# Allegro board 14134-IMX178_LV_REFB_VER_A.brd
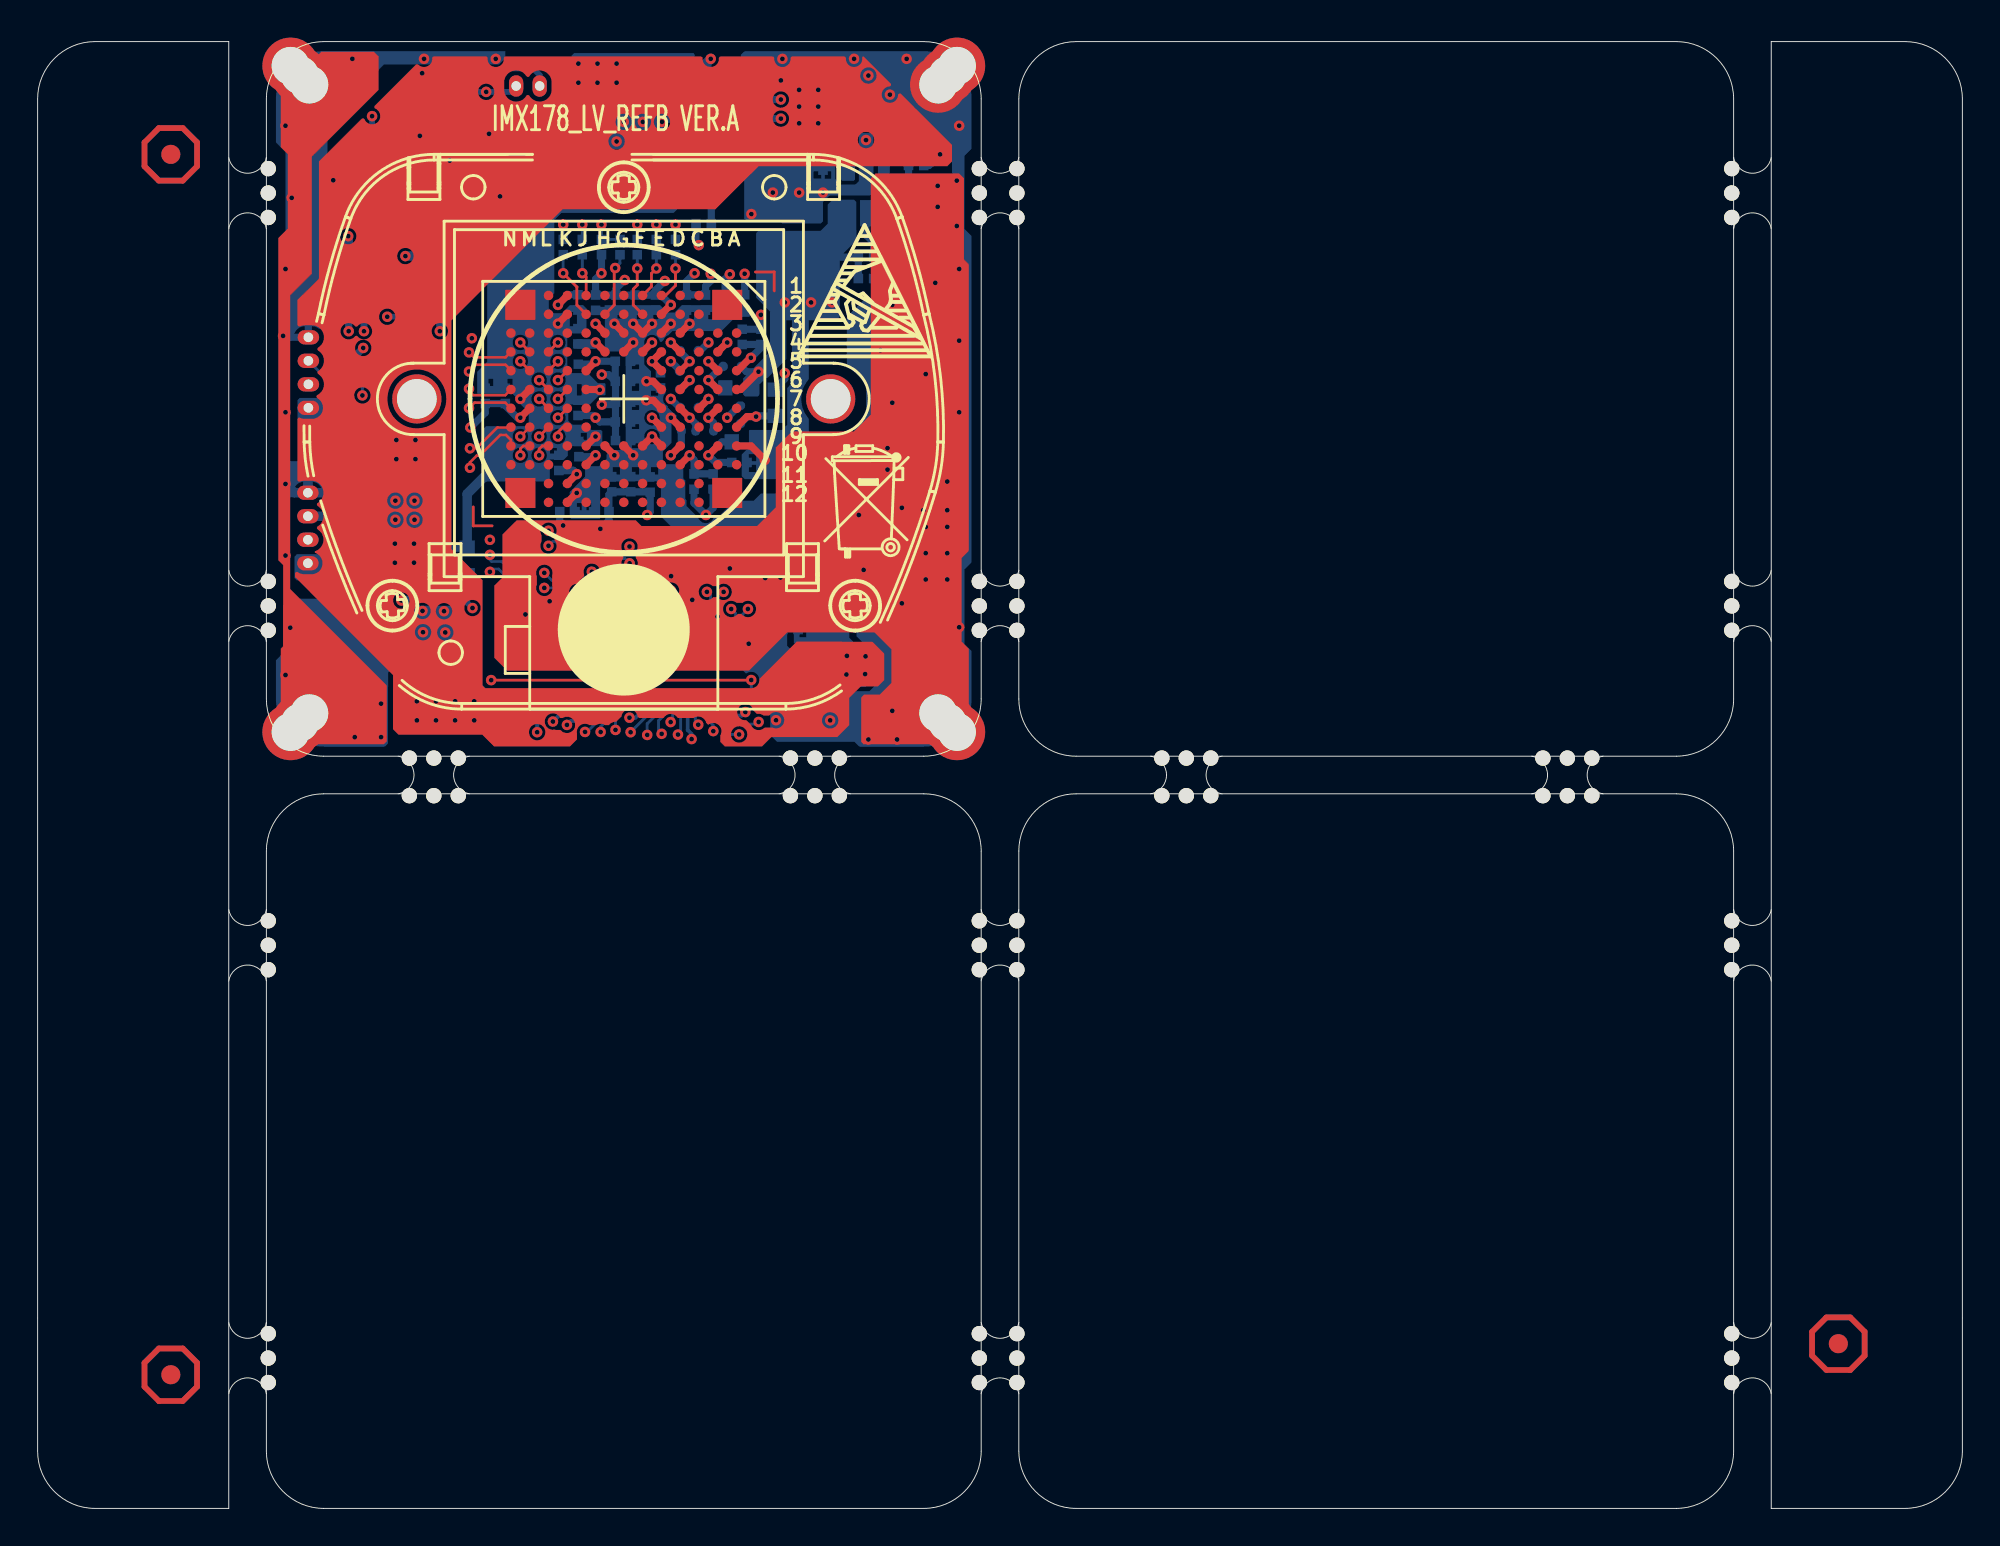
[diagram p0: board, top side]
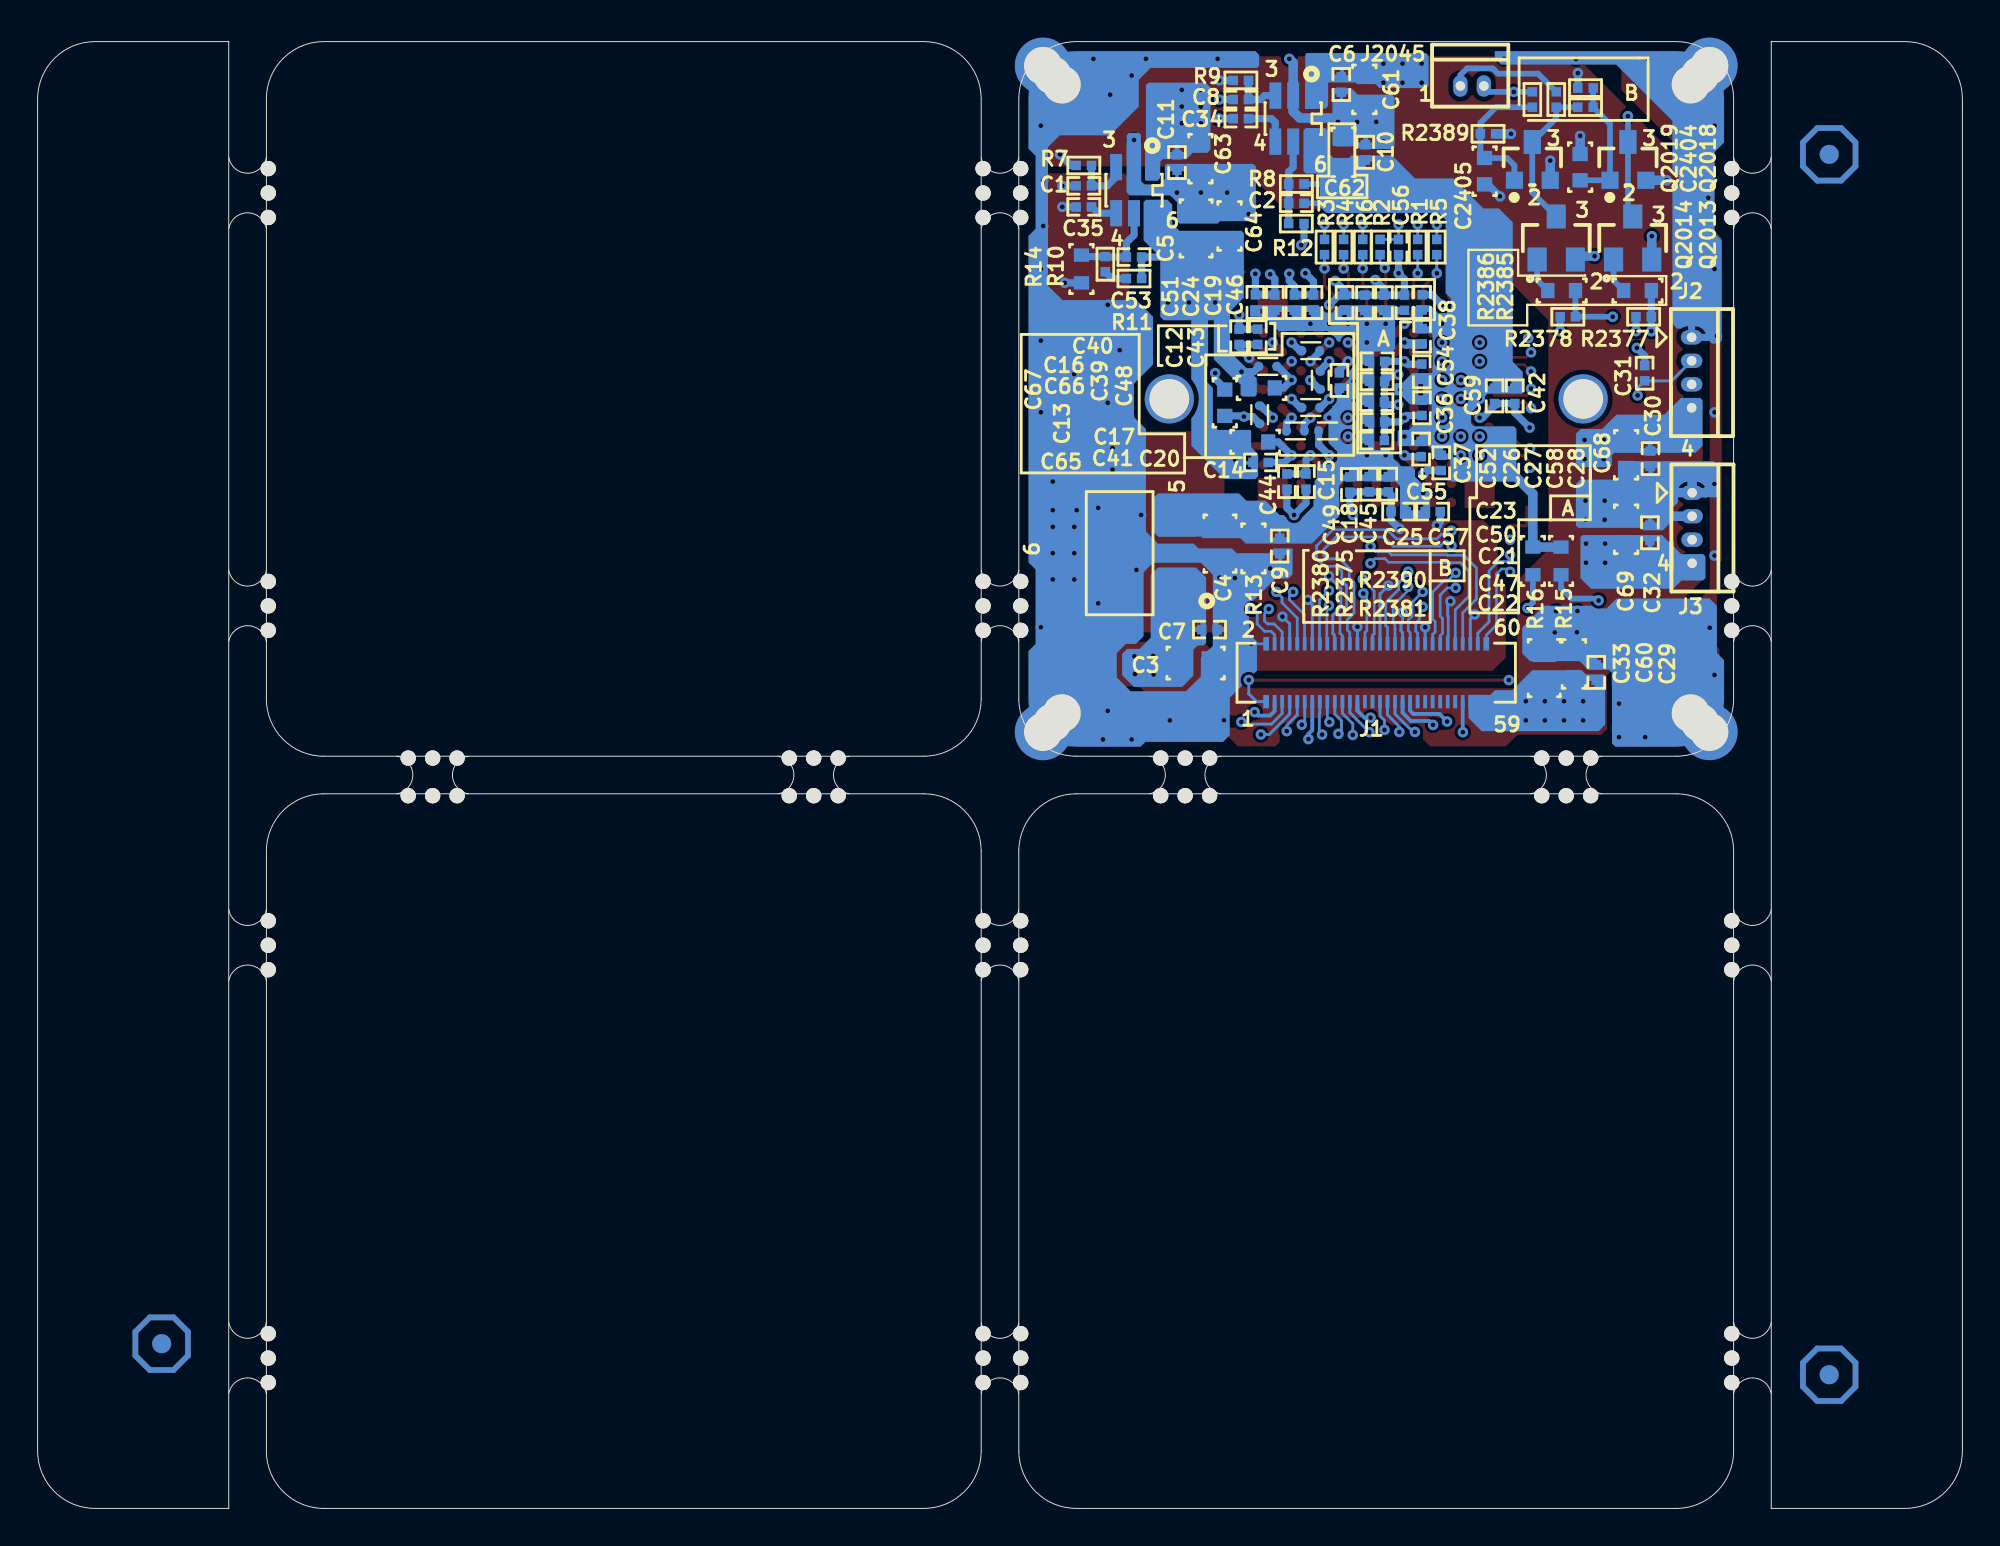
[diagram p1: board, bottom side, seen from below]

Outline 102.32 x 78 mm; copper layers: TOP, GND02, ART03, ART04, POWER05, BOTTOM. Coordinates in mm from the lower left corner of the outline.
Outline path: 0,74.95 arc(0.89,77.11) 3.05,78 10.16,78 10.16,0 3.05,0 arc(0.89,0.89) 0,3.05 0,74.95 ; 12.16,74.95 arc(13.05,77.11) 15.21,78 47.11,78 arc(49.27,77.11) 50.16,74.95 50.16,43.05 arc(49.27,40.89) 47.11,40 15.21,40 arc(13.05,40.89) 12.16,43.05 12.16,74.95 ; 12.16,34.95 arc(13.05,37.11) 15.21,38 47.11,38 arc(49.27,37.11) 50.16,34.95 50.16,3.05 arc(49.27,0.89) 47.11,0 15.21,0 arc(13.05,0.89) 12.16,3.05 12.16,34.95 ; 52.16,74.95 arc(53.05,77.11) 55.21,78 87.11,78 arc(89.27,77.11) 90.16,74.95 90.16,43.05 arc(89.27,40.89) 87.11,40 55.21,40 arc(53.05,40.89) 52.16,43.05 52.16,74.95 ; 52.16,34.95 arc(53.05,37.11) 55.21,38 87.11,38 arc(89.27,37.11) 90.16,34.95 90.16,3.05 arc(89.27,0.89) 87.11,0 55.21,0 arc(53.05,0.89) 52.16,3.05 52.16,34.95 ; 92.16,78 99.27,78 arc(101.43,77.11) 102.32,74.95 102.32,3.05 arc(101.43,0.89) 99.27,0 92.16,0 92.16,78

## Design rules (mm)
net group DIFFPAIR0: nets MIPI0_D2M MIPI0_D2P
net group DIFFPAIR1: nets MIPI0_D0M MIPI0_D0P
net group DIFFPAIR2: nets MIPI0_CKM MIPI0_CKP
net group DIFFPAIR3: nets MIPI0_D3M MIPI0_D3P
net group DIFFPAIR4: nets MIPI1_D2M MIPI1_D2P
net group DIFFPAIR5: nets MIPI1_D0M MIPI1_D0P
net group DIFFPAIR6: nets MIPI1_CKM MIPI1_CKP
net group DIFFPAIR7: nets MIPI1_D1M MIPI1_D1P
net group DIFFPAIR8: nets MIPI1_D3M MIPI1_D3P
net group DIFFPAIR9: nets MIPI0_D1M MIPI0_D1P

## Placement (name value [footprint] x y rotation side)
C1  -  [SC0402]  46.7 70.33 0 bottom
C2  -  [SC0402]  35.41 69.41 0 bottom
C3  -  [SC0805]  40.76 44.95 180 bottom
C4  -  [SC0805]  39.46 51.3 270 bottom
C5  -  [SC0805]  40.73 68.07 90 bottom
C6  -  [SC0402]  33.02 75.72 270 bottom
C7  -  [SC0402]  40.02 46.73 180 bottom
C8  -  [SC0402]  38.35 74.92 0 bottom
C9  -  [SC0402]  36.29 51.18 270 bottom
C10  -  [SC0402]  31.74 72.11 90 bottom
C11  -  [SC0402]  41.75 71.57 270 bottom
C12  -  [SC0402]  38.45 62.3 90 bottom
C13  -  [SC0402-BGA]  37.36 58.16 90 bottom
C14  -  [SC0402]  37.31 55.62 180 bottom
C15  -  [SC0402]  34.89 54.6 270 bottom
C16  -  [SC0402-BGA]  36.92 60.73 180 bottom
C17  -  [SC0402-BGA]  34.64 58.54 180 bottom
C18  -  [SC0402]  31.53 54.46 270 bottom
C19  -  [SC0402]  35.51 64.12 90 bottom
C20  -  [SC0402-BGA]  33.75 57.3 0 bottom
C21  -  [SC0402]  31.13 58.83 180 bottom
C22  -  [SC0402]  31.13 56.79 180 bottom
C23  -  [SC0402]  31.11 61 180 bottom
C24  -  [SC0402]  36.55 64.12 90 bottom
C25  -  [SC0402]  29.97 53.01 0 bottom
C26  -  [SC0402]  31.76 64.11 90 bottom
C27  -  [SC0402]  30.75 64.11 90 bottom
C28  -  [SC0402]  28.72 64.13 90 bottom
C29  -  [SC0402]  19.46 44.46 90 bottom
C30  -  [SC0402]  16.58 55.82 270 bottom
C31  -  [SC0402]  16.89 60.37 90 bottom
C32  -  [SC0402]  16.61 51.88 90 bottom
C33  -  [SC0805]  22.23 44.69 90 bottom
C34  -  [SC0402]  38.35 73.9 0 bottom
C35  -  [SC0402]  46.7 69.21 0 bottom
C36  -  [SC0402]  28.73 58.53 270 bottom
C37  -  [SC0402]  27.7 55.6 270 bottom
C38  -  [SC0402]  28.72 62.33 270 bottom
C39  -  [SC0402-BGA]  34.13 59.99 90 bottom
C40  -  [SC0402-BGA]  34.64 61.56 0 bottom
C41  -  [SC0402-BGA]  35.46 57.3 180 bottom
C42  -  [SC0402]  23.79 59.16 270 bottom
C43  -  [SC0402]  37.45 62.3 90 bottom
C44  -  [SC0402]  35.91 54.6 270 bottom
C45  -  [SC0402]  30.52 54.46 270 bottom
C46  -  [SC0402]  34.49 64.12 90 bottom
C47  -  [SC0402]  31.11 57.78 180 bottom
C48  -  [SC0402]  33.11 59.98 90 bottom
C49  -  [SC0402]  32.56 54.45 270 bottom
C50  -  [SC0402]  31.11 59.93 180 bottom
C51  -  [SC0402]  37.59 64.13 90 bottom
C52  -  [SC0402]  32.84 64.12 90 bottom
C53  -  [SC0402]  44.04 66.54 0 bottom
C54  -  [SC0402]  28.74 60.44 90 bottom
C55  -  [SC0402]  28.77 56.33 270 bottom
C56  -  [SC0402]  29.98 67.07 270 bottom
C57  -  [SC0402]  28.16 53.01 180 bottom
C58  -  [SC0402]  29.66 64.11 90 bottom
C59  -  [SC0402]  24.87 59.16 270 bottom
C60  -  [SC0603]  20.65 44.9 90 bottom
C61  -  [SC0603]  31.79 75.46 270 bottom
C62  -  [SC0603]  32.91 72.12 90 bottom
C63  -  [SC0603]  40.51 71.78 270 bottom
C64  -  [SC0603]  38.96 68.19 90 bottom
C65  -  [SC0603]  37.6 56.71 180 bottom
C66  -  [SC0603]  37.26 59.58 180 bottom
C67  -  [SC0603]  39.21 58.8 90 bottom
C68  -  [SC0603]  17.87 56.03 270 bottom
C69  -  [SC0603]  17.87 52.06 90 bottom
C2404  -  [SC0603]  20.32 71.33 270 bottom
C2405  -  [SC0603]  25.4 71.11 90 bottom
J1  -  [SED60-16F-A]  31.16 44.44 180 bottom
J2  -  [WBC0104-49T]  14.39 62.28 270 bottom
J3  -  [WBC0104-49T]  14.37 54.01 270 bottom
J2045  -  [SIP-2P-20]  26.69 75.64 180 bottom
M1  -  [HOLE_3]  47.87 42.29 0 top
M2  -  [HOLE_3]  47.87 75.71 90 top
M3  -  [HOLE_3]  13.45 76.71 0 top
M4  -  [HOLE_3]  13.45 41.29 90 top
NOREF  -  []  46.6 53.67 0 top
NOREF#2  -  [unnamed#2]  11.16 28.65 270 top
NOREF#3  -  []  31.67 46.96 0 top
NOREF#4  -  []  15.21 40 90 top
NOREF#5  -  []  0 3.05 0 top
NOREF#6  -  [unnamed#3]  51.16 71.25 90 top
NOREF#7  -  [unnamed#3]  40.02 39 180 top
NOREF#8  -  [unnamed#3]  59.76 39 180 top
NOREF#9  -  [unnamed#2]  11.16 6.69 270 top
NOREF#10  -  [unnamed#3]  19.76 39 180 top
NOREF#11  -  []  164.84 166.97 0 top
NOREF#12  -  [unnamed#3]  51.16 31.25 90 top
NOREF#13  -  [unnamed#4]  95.73 8.76 0 top
NOREF#14  -  [unnamed#2]  91.16 9.29 90 top
NOREF#15  -  [unnamed#2]  11.16 68.65 270 top
NOREF#16  -  [unnamed#2]  91.16 71.25 90 top
NOREF#17  -  []  168.72 93.19 0 top
NOREF#18  -  []  12.16 74.95 0 top
NOREF#19  -  []  52.19 151.38 0 top
NOREF#20  -  [unnamed#4]  7.08 7.11 0 top
NOREF#21  -  []  43.27 64.26 0 top
NOREF#22  -  []  -118.88 -143.82 0 top
NOREF#23  -  [unnamed#2]  91.16 31.25 90 top
NOREF#24  -  [unnamed#2]  91.16 49.29 90 top
NOREF#25  -  [unnamed#3]  51.16 49.29 90 top
NOREF#26  -  [unnamed#3]  51.16 9.29 90 top
NOREF#27  -  [unnamed#4]  7.08 72 0 top
NOREF#28  -  [unnamed#2]  11.16 46.69 270 top
NOREF#29  -  []  10.18 75.28 0 top
NOREF#30  -  []  15.21 0 90 top
NOREF#31  -  [unnamed#3]  80.02 39 180 top
NOREF#32  -  [unnamed#4]  7.08 7.11 180 bottom
NOREF#33  -  [unnamed#4]  7.08 72 180 bottom
NOREF#34  -  [unnamed#4]  95.73 8.76 180 bottom
Q2013  -  [SOT23]  17.53 67.55 180 bottom
Q2014  -  [SOT23]  21.59 67.55 180 bottom
Q2018  -  [HSOT23]  17.78 71.62 180 bottom
Q2019  -  [HSOT23]  22.86 71.62 180 bottom
R1  -  [SR0402]  28.96 67.07 90 bottom
R2  -  [SR0402]  30.96 67.07 90 bottom
R3  -  [SR0402]  33.91 67.07 90 bottom
R4  -  [SR0402]  32.89 67.07 90 bottom
R5  -  [SR0402]  27.94 67.07 90 bottom
R6  -  [SR0402]  31.88 67.07 90 bottom
R7  -  [SR0402]  46.7 71.41 180 bottom
R8  -  [SR0402]  35.41 70.42 0 bottom
R9  -  [SR0402]  38.35 75.94 180 bottom
R10  -  [SR0402]  45.56 66.16 90 bottom
R11  -  [SR0402]  44.04 65.4 0 bottom
R12  -  [SR0402]  35.41 68.32 180 bottom
R13  -  [SR0603]  37.69 51.05 270 bottom
R14  -  [SR0603]  46.83 65.91 270 bottom
R15  -  [SR0603]  21.34 50.39 90 bottom
R16  -  [SR0603]  22.83 50.38 90 bottom
R2375  -  [SR0402]  21.59 74.92 90 bottom
R2377  -  [SR0402]  16.94 63.37 0 bottom
R2378  -  [SR0402]  20.97 63.37 0 bottom
R2380  -  [SR0402]  22.86 74.92 90 bottom
R2381  -  [SR0402]  20.03 74.51 0 bottom
R2385  -  [SR0603]  17.27 64.76 0 bottom
R2386  -  [SR0603]  21.3 64.76 0 bottom
R2389  -  [SR0402]  25.22 73.1 0 bottom
R2390  -  [SR0402]  20.03 75.53 180 bottom
U1  VALUE  [LGA128-40-1312]  31.16 59 180 top
U2  -  [SOT223-6A]  44.8 50.79 90 bottom
U3  -  [SOT23-6B]  35.57 73.9 0 bottom
U4  -  [SOT23-6B]  44.04 70.1 0 bottom
U5  VALUE  [LENS_SOCKET-GS5]  31.16 59 0 top

## Library data of the parts
C1 C2 C6-C12 C14 C15 C18 C19 C21-C32 C34-C38 C42-C59 = SC0402
C3-C5 C33 = SC0805
C13 C16 C17 C20 C39-C41 = SC0402-BGA
C60-C69 C2404 C2405 = SC0603
J1 = SED60-16F-A
J2 J3 = WBC0104-49T
J2045 = SIP-2P-20
M1-M4 = HOLE_3
Q2013 Q2014 = SOT23
Q2018 Q2019 = HSOT23
R1-R12 R2375 R2377 R2378 R2380 R2381 R2389 R2390 = SR0402
R13-R16 R2385 R2386 = SR0603
U1 = LGA128-40-1312
U2 = SOT223-6A
U3 U4 = SOT23-6B
U5 = LENS_SOCKET-GS5

## Footprints (pads in the part's own frame, mm; a bottom-side part is the same pattern mirrored in y, then rotated)
HOLE_3
  round 2.997 hole 2.007: 1(0,0) 2(0.5,-0.5) 3(1,-1)
HSOT23
  rect 0.914x0.914 smd: 1(-0.953,-0.991) 2(0.953,-0.991)
  rect 0.914x1.27 smd: 3(0,1.041)
LENS_SOCKET-GS5
  round 2.616 hole 2.108: 1(-11,0) 2(11,0)
LGA128-40-1312
  rect 1.6x1.6 smd: 1(-5.5,-5) 2(-5.5,5) 3(5.5,-5) 4(5.5,5)
  round 0.508 smd: A3(-6,-3.5) A4(-6,-2.5) A5(-6,-1.5) A6(-6,-0.5) A7(-6,0.5) A8(-6,1.5) A9(-6,2.5) A10(-6,3.5) B3(-5,-3.5) B4(-5,-2.5) B5(-5,-1.5) B6(-5,-0.5) B7(-5,0.5) B8(-5,1.5) B9(-5,2.5) B10(-5,3.5) C1(-4,-5.5) C2(-4,-4.5) C3(-4,-3.5) C4(-4,-2.5) C5(-4,-1.5) C6(-4,-0.5) C7(-4,0.5) C8(-4,1.5) C9(-4,2.5) C10(-4,3.5) C11(-4,4.5) C12(-4,5.5) D1(-3,-5.5) D2(-3,-4.5) D3(-3,-3.5) D4(-3,-2.5) D5(-3,-1.5) D6(-3,-0.5) D7(-3,0.5) D8(-3,1.5) D9(-3,2.5) D10(-3,3.5) D11(-3,4.5) D12(-3,5.5) E1(-2,-5.5) E2(-2,-4.5) E3(-2,-3.5) E4(-2,-2.5) E5(-2,-1.5) E6(-2,-0.5) E7(-2,0.5) E8(-2,1.5) E9(-2,2.5) E10(-2,3.5) E11(-2,4.5) E12(-2,5.5) F1(-1,-5.5) F2(-1,-4.5) F3(-1,-3.5) F4(-1,-2.5) F9(-1,2.5) F10(-1,3.5) F11(-1,4.5) F12(-1,5.5) G1(0,-5.5) G2(0,-4.5) G3(0,-3.5) G4(0,-2.5) G9(0,2.5) G10(0,3.5) G11(0,4.5) G12(0,5.5) H1(1,-5.5) H2(1,-4.5) H3(1,-3.5) H4(1,-2.5) H9(1,2.5) H10(1,3.5) H11(1,4.5) H12(1,5.5) J1(2,-5.5) J2(2,-4.5) J3(2,-3.5) J4(2,-2.5) J5(2,-1.5) J6(2,-0.5) J7(2,0.5) J8(2,1.5) J9(2,2.5) J10(2,3.5) J11(2,4.5) J12(2,5.5) K1(3,-5.5) K2(3,-4.5) K3(3,-3.5) K4(3,-2.5) K5(3,-1.5) K6(3,-0.5) K7(3,0.5) K8(3,1.5) K9(3,2.5) K10(3,3.5) K11(3,4.5) K12(3,5.5) L1(4,-5.5) L2(4,-4.5) L3(4,-3.5) L4(4,-2.5) L5(4,-1.5) L6(4,-0.5) L7(4,0.5) L8(4,1.5) L9(4,2.5) L10(4,3.5) L11(4,4.5) L12(4,5.5) M3(5,-3.5) M4(5,-2.5) M5(5,-1.5) M6(5,-0.5) M7(5,0.5) M8(5,1.5) M9(5,2.5) M10(5,3.5) N3(6,-3.5) N4(6,-2.5) N5(6,-1.5) N6(6,-0.5) N7(6,0.5) N8(6,1.5) N9(6,2.5) N10(6,3.5)
SC0402
  rect 0.508x0.508 smd: 1(-0.406,0) 2(0.406,0)
SC0402-BGA
  custom 0.475x0.51 smd: 1(-0.47,0) 2(0.47,0)
SC0603
  rect 0.762x0.813 smd: 1(-0.699,0) 2(0.699,0)
SC0805
  rect 0.991x1.27 smd: 1(-0.813,0) 2(0.813,0)
SED60-16F-A
  rect 0.305x0.711 smd: 1(-5.851,-1.54) 2(-5.851,1.54) 59(5.851,-1.54) 60(5.851,1.54)
  rect 0.203x0.711 smd: 3(-5.4,-1.54) 4(-5.4,1.54) 5(-5,-1.54) 6(-5,1.54) 7(-4.6,-1.54) 8(-4.6,1.54) 9(-4.2,-1.54) 10(-4.2,1.54) 11(-3.8,-1.54) 12(-3.8,1.54) 13(-3.4,-1.54) 14(-3.4,1.54) 15(-3,-1.54) 16(-3,1.54) 17(-2.6,-1.54) 18(-2.6,1.54) 19(-2.2,-1.54) 20(-2.2,1.54) 21(-1.8,-1.54) 22(-1.8,1.54) 23(-1.4,-1.54) 24(-1.4,1.54) 25(-1,-1.54) 26(-1,1.54) 27(-0.6,-1.54) 28(-0.6,1.54) 29(-0.2,-1.54) 30(-0.2,1.54) 31(0.2,-1.54) 32(0.2,1.54) 33(0.6,-1.54) 34(0.6,1.54) 35(1,-1.54) 36(1,1.54) 37(1.4,-1.54) 38(1.4,1.54) 39(1.8,-1.54) 40(1.8,1.54) 41(2.2,-1.54) 42(2.2,1.54) 43(2.6,-1.54) 44(2.6,1.54) 45(3,-1.54) 46(3,1.54) 47(3.4,-1.54) 48(3.4,1.54) 49(3.8,-1.54) 50(3.8,1.54) 51(4.2,-1.54) 52(4.2,1.54) 53(4.6,-1.54) 54(4.6,1.54) 55(5,-1.54) 56(5,1.54) 57(5.4,-1.54) 58(5.4,1.54)
SIP-2P-20
  oval 0.762x1.143 hole 0.508: 1(0,0) 2(1.25,0)
SOT23
  rect 1.016x1.27 smd: 1(-1.016,-1.143) 2(1.016,-1.143) 3(0,1.143)
SOT23-6B
  rect 0.635x1.397 smd: 1(-0.95,-1.225) 2(0,-1.225) 3(0.95,-1.225) 4(0.95,1.225) 5(0,1.225) 6(-0.95,1.225)
SOT223-6A
  rect 0.762x2.032 smd: 1(-2.54,-3.05) 2(-1.27,-3.05) 3(0,-3.05) 4(1.27,-3.05) 5(2.54,-3.05)
  rect 3.556x2.032 smd: 6(0,3.05)
SR0402
  rect 0.508x0.508 smd: 1(-0.406,0) 2(0.406,0)
SR0603
  rect 0.711x0.813 smd: 1(-0.737,0) 2(0.737,0)
unnamed#2
  round 0.813 hole 0.813 unplated: (-2.6,1.1) (-1.3,1.1) (0,1.1)
unnamed#3
  round 0.813 hole 0.813 unplated: (-2.6,1.1) (-2.6,-0.9) (-1.3,1.1) (-1.3,-0.9) (0,1.1) (0,-0.9)
unnamed#4
  round 1.016 smd: 1(0,0)
WBC0104-49T
  oval 0.762x1.143 hole 0.508: 1(0,0) 2(1.25,0) 3(2.5,0) 4(3.75,0)

## Nets
3V3: C3.1 C6.1 C7.1 C11.1 C29.1 C30.1 C32.1 C33.1 C60.1 C61.1 C63.1 C68.1 C69.1 C2404.1 C2405.1 J1.55 J1.57 J1.59 J2.4 J3.4 Q2018.2 Q2019.2 R7.1 R9.1 R2389.1 R2390.1 U2.1 U2.2 U3.1 U4.1
AVDD_2V9: C5.1 C12.1 C13.1 C14.1 C15.1 C16.1 C43.1 C44.1 C53.1 C64.1 C65.1 C66.1 C67.1 R11.1 U1.A5 U1.A6 U1.A8 U1.A9 U1.D10 U4.6
DVDD_1V2: C4.1 C9.1 C18.1 C19.1 C20.1 C21.1 C22.1 C23.1 C24.1 C25.1 C26.1 C27.1 C45.1 C46.1 C47.1 C48.1 C49.1 C50.1 C51.1 C52.1 C57.1 C58.1 R13.1 U1.D3 U1.D8 U1.E3 U1.E6 U1.E7 U1.F3 U1.G3 U1.G4 U1.G9 U1.H9 U1.K12 U2.4 U2.5
GND: C1.2 C3.2 C4.2 C5.2 C6.2 C7.2 C8.2 C9.2 C10.2 C11.2 C12.2 C13.2 C14.2 C15.2 C16.2 C17.2 C18.2 C19.2 C20.2 C21.2 C22.2 C23.2 C24.2 C25.2 C26.2 C27.2 C28.2 C29.2 C30.2 C31.2 C32.2 C33.2 C34.2 C35.2 C36.2 C37.2 C38.2 C39.2 C40.2 C41.2 C42.2 C43.2 C44.2 C45.2 C46.2 C47.2 C48.2 C49.2 C50.2 C51.2 C52.2 C54.2 C55.2 C56.2 C57.2 C58.2 C59.2 C60.2 C61.2 C62.2 C63.2 C64.2 C65.2 C66.2 C67.2 C68.2 C69.2 J1.2 J1.3 J1.8 J1.13 J1.14 J1.19 J1.20 J1.25 J1.26 J1.32 J1.37 J1.38 J1.44 J1.50 J1.53 J1.56 J2.1 J3.1 J3.2 M1.1 M1.2 M1.3 M2.1 M2.2 M2.3 M3.1 M3.2 M3.3 M4.1 M4.2 M4.3 Q2013.2 Q2014.2 R12.2 R13.2 R14.2 R2377.2 R2378.2 U1.B4 U1.B5 U1.B6 U1.B9 U1.D4 U1.D7 U1.D9 U1.E2 U1.E4 U1.E5 U1.E8 U1.E9 U1.F4 U1.F9 U1.H3 U1.H4 U1.J5 U1.J10 U1.K1 U1.K11 U1.M7 U2.3 U2.6 U3.2 U4.2
VDDIO_1V8: C2.1 C10.1 C28.1 C36.1 C37.1 C38.1 C42.1 C54.1 C55.1 C59.1 C62.1 R8.1 R15.2 R16.2 U1.J6 U1.J9 U1.K2 U1.M6 U3.6
DRV0: J2045.1 R2375.2
DRV1: J2045.2 Q2013.3 Q2018.3 R2380.2
FLASH_TRIG: J1.27
GPIO1: J1.41
GPIO2: J1.43
GPIO3: J1.45
GPIO4: J1.47
GPIO5: J1.49
GPIO6: J1.51
IR-LED-CONTROL: C31.1 J1.31 J2.2
IRCUT-CONTROL1: J1.33 R2377.1 R2385.1
IRCUT-CONTROL2: J1.35 R2378.1 R2386.1
LIGHT-RESISTOR: J1.1 J2.3
MIPI0_CKM: J1.22 U1.N6
MIPI0_CKP: J1.24 U1.N7
MIPI0_D0M: J1.10 U1.N4
MIPI0_D0P: J1.12 U1.N5
MIPI0_D1M: J1.4 U1.N8
MIPI0_D1P: J1.6 U1.N9
MIPI0_D2M: J1.28 U1.M4
MIPI0_D2P: J1.30 U1.M5
MIPI0_D3M: J1.16 U1.M8
MIPI0_D3P: J1.18 U1.M9
MIPI1_CKM: J1.48 U1.L6
MIPI1_CKP: J1.46 U1.L7
MIPI1_D0M: J1.54 U1.K5
MIPI1_D0P: J1.52 U1.K6
MIPI1_D1M: J1.42 U1.K7
MIPI1_D1P: J1.40 U1.K8
MIPI1_D2M: J1.60 U1.L4
MIPI1_D2P: J1.58 U1.L5
MIPI1_D3M: J1.36 U1.L8
MIPI1_D3P: J1.34 U1.L9
PWM: J1.39 J3.3
SENSOR_CLK: J1.17 R1.2
SENSOR_RESET: C56.1 J1.15 R2.2
SHUTTER_TRIG: J1.29
SPI0_CLK: J1.5 R5.2
SPI0_CS: J1.9 R6.2
SPI0_MISO: J1.11 R3.2
SPI0_MOSI: J1.7 R4.2
VI_POWER1: J1.21 R15.1
VI_POWER2: J1.23 R16.1
$3N29: C8.1 R9.2 U3.3
$3N34: C34.1 U3.4
$3N39: C2.2 R8.2 R12.1 U3.5
$3N58: C35.1 U4.4
$3N64: C1.1 R7.2 U4.3
$3N75: R10.1 R11.2
$3N77: C53.2 R10.2 R14.1 U4.5
$4N188: C41.1 U1.B7
$4N192: C40.1 U1.D5
$4N194: C39.1 U1.D6
$4N196: C17.1 U1.C7
$4N210: R6.1 U1.F2
$4N211: R5.1 U1.J2
$4N212: R4.1 U1.F1
$4N213: R3.1 U1.E1
$4N214: R1.1 U1.J1
$4N215: R2.1 U1.H2
$5N8: C2404.2 Q2018.1 R2381.1 R2390.2
$5N9: C2405.2 Q2019.1 R2380.1 R2389.2
$5N33: Q2014.3 Q2019.3 R2375.1 R2381.2
$5N37: Q2013.1 R2385.2
$5N49: Q2014.1 R2386.2

Pads without a net: NOREF#13 1; NOREF#20 1; NOREF#27 1; NOREF#32 1; NOREF#33 1; NOREF#34 1; U1 1 2 3 4 A3 A4 A7 A10 B3 B8 B10 C1 C2 C3 C4 C5 C6 C8 C9 C10 C11 C12 D1 D2 D11 D12 E10 E11 E12 F10 F11 F12 G1 G2 G10 G11 G12 H1 H10 H11 H12 J3 J4 J7 J8 J11 J12 K3 K4 K9 K10 L1 L2 L3 L10 L11 L12 M3 M10 N3 N10; U5 1 2

## Via types
v1: diameter 0.559, hole 0.254, TOP to BOTTOM, 282 vias

## Routing (per net, layer and track width the routed paths; a pad name or vN(x,y) marks a point on that pad's centre or on a via; arc(x,y) is an arc through that point)
3V3: length 7.7
  BOTTOM w0.381: R7.1 47.38,71.41 v1(47.97,72) ; R2390.1 v1(20.44,76.32) ; R9.1 v1(39.51,75.94) ; v1(24.58,69.77) 25.22,70.41 C2405.1
  BOTTOM w0.508: R2389.1 v1(24,73.1) ; Q2018.2 v1(15.72,70.63) ; C2404.1 v1(20.32,72.99) ; Q2019.2 v1(21.91,71.67)
  vias: v1(18.99,51.3) v1(18.99,50.29) v1(19.07,56.81) v1(19.07,55.8) v1(20.01,51.3) v1(20.01,50.29) v1(20.08,56.81) v1(20.08,55.8) v1(20.16,42.92) v1(20.16,41.9) v1(21.18,42.92) v1(21.18,41.9) v1(22.19,42.92) v1(22.19,41.9) v1(23.21,42.92) v1(23.21,41.9) v1(28.75,76.83) v1(28.75,75.81) v1(29.76,76.83) v1(29.76,75.81) v1(30.78,76.83) v1(30.78,75.81) v1(40.48,75.43) v1(40.48,74.54) v1(40.48,73.65) v1(41.5,75.43) v1(41.5,74.54) v1(41.5,73.65) v1(43,44.34) v1(43.02,45.33) v1(43.99,44.37) v1(44.01,45.31)
AVDD_2V9: length 20.4
  TOP w0.381: v1(37.92,61.18) 37.89,61.18 37.21,60.5 U1.A5 ; U1.A6 37.38,59.5 v1(38.32,60.45) ; U1.A9 37.93,56.5 38.65,55.77 v1(38.65,55.75) ; v1(38.19,58.06) 37.71,58.06 37.16,57.51 U1.A8 ; U1.D10 v1(34.66,56)
  BOTTOM w0.381: v1(38.32,60.45) 37.67,60.45 C16.1 ; v1(34.66,56) 34.89,55.77 C15.1 C44.1 ; R11.1 C53.1 42.39,66.54 41.88,66.03 40.1,66.03 39.72,65.65 v1(39.72,64.13) ; v1(37.92,61.18) 38.45,61.72 C12.1 C43.1 ; C13.1 37.73,58.06 v1(38.19,58.06) 38.23,58.1 C67.1
  vias: v1(41.12,64.13) v1(42.23,64.13)
DVDD_1V2: length 10.1
  TOP w0.381: U1.H9 v1(30.66,56) ; U1.D3 v1(34.66,63) ; U1.E3 v1(33.66,63) ; U1.E6 32.72,59.94 v1(32.37,59.94) ; v1(32.35,58.92) 32.74,58.92 U1.E7 ; U1.G3 v1(30.66,63) ; v1(32.66,63) U1.F3 32.16,62.5 v1(31.66,63) ; U1.G9 v1(31.66,56) ; U1.K12 v1(28.66,54) ; U1.G4 v1(31.66,62) ; U1.D8 v1(33.66,58)
  BOTTOM w0.381: C58.1 C27.1
GND: length 126.6
  TOP w0.381: U1.J10 v1(29.66,56) ; U1.D9 v1(33.66,56) ; U1.B5 v1(35.66,61) ; U1.D4 v1(33.66,62) ; U1.B9 v1(35.66,56) ; U1.F9 32.16,56.5 v1(32.66,57) U1.E9 ; U1.E5 v1(32.66,61) U1.E4 ; U1.D7 v1(34.66,58) ; U1.B4 36.16,61.5 v1(36.66,62) ; U1.K11 v1(28.66,55) ; U1.M7 v1(25.66,58) ; U1.K1 v1(27.66,64) ; U1.J5 v1(29.66,61) ; U1.H4 v1(29.66,62) ; U1.F4 v1(32.66,62) ; U1.E8 v1(32.66,58) ; U1.H3 v1(29.66,63) ; U1.E2 v1(33.66,64) ; U1.B6 v1(35.66,60)
  BOTTOM w0.152: v1(33.67,49.58) 33.67,49.55 33.04,48.92 33.04,47.92 33.47,47.49 33.47,46.53 33.39,46.45 33.39,46.01 J1.20 ; v1(30.52,49.07) 30.96,48.63 J1.32 ; J1.26 v1(32.16,46.88) ; J1.56 26.16,47.31 v1(25.93,47.54) ; J1.8 35.76,47.04 v1(36.15,47.42) ; J1.44 28.56,46.86 v1(28.56,46.86) ; J1.14 34.56,48.07 v1(34.8,48.31) ; v1(29.76,47.65) 29.76,47.09 29.85,47.01 29.85,46.67 29.76,46.59 J1.38 ; v1(33.17,41.19) 33.01,41.35 33.01,41.89 33.36,42.24 J1.19 ; v1(27.22,48.24) 27.36,48.1 27.36,47.46 27.33,47.43 27.33,46.39 27.36,46.37 J1.50 ; v1(37.8,45.98) 37.8,45.98 J1.2
  BOTTOM w0.203: J1.25 32.16,42.47 32.16,42.47 32.16,42.42 31.79,42.05 v1(31.46,42.05) ; v1(34.76,40.91) 34.76,41.18 34.56,41.39 J1.13 ; v1(37.62,42.35) 37.44,42.16 36.8,42.16 36.56,42.4 J1.3 ; v1(26.55,41.28) 26.56,41.28 J1.53 ; v1(28.14,41.66) 28.35,41.87 29.32,41.87 29.76,42.32 J1.37
  BOTTOM w0.381: C65.2 36.37,56.71 v1(35.66,56) 36.04,55.62 C14.2 ; C54.2 29.51,60.85 v1(29.66,61) C23.2 C50.2 ; v1(33.34,65.27) 32.84,64.77 C52.2 ; C40.2 35.22,61.56 v1(35.66,62) ; v1(29.99,58.69) 30.59,58.69 C21.2 ; C52.2 32.83,64.52 C26.2 C27.2 ; C52.2 33.13,64.53 v1(33.66,64) ; v1(32.4,52.83) 32.56,52.99 C49.2 32.55,54.06 C18.2 C45.2 30.37,53.91 C25.2 30.37,52.55 v1(29.91,52.09) ; C31.2 16.89,61.29 v1(17.31,61.71) ; v1(34.92,65.68) 34.49,65.25 C46.2 C19.2 35.51,65 35.78,65.27 v1(35.78,65.65) ; C48.2 33.11,60.54 v1(32.66,61) ; C21.2 30.72,59.92 C50.2 ; C21.2 30.72,57.79 C47.2 ; C47.2 30.72,57.76 C22.2 ; C47.2 29.88,57.78 v1(29.66,58) 29.54,58.12 C36.2 ; v1(39.72,60.37) 39.72,60.07 39.21,59.56 C67.2 ; C27.2 30.75,64.86 v1(31.21,65.32) ; C27.2 C58.2 29.66,65.37 v1(29.97,65.68) 29.98,65.69 C56.2 ; v1(29.99,60.29) 30.35,60.29 C50.2 ; C17.2 34.12,58.54 v1(33.66,59) ; R2378.2 v1(21.38,62.6) ; C41.2 34.99,57.67 v1(34.66,58) 34.66,58.01 ; v1(36.8,65.63) 36.55,65.38 C24.2 36.56,64.54 C51.2 v1(37.59,65.65) ; C1.2 v1(47.85,70.33) ; C39.2 34.13,60.53 v1(33.66,61) ; v1(35.15,67.18) 35,67.32 R12.2 ; v1(29.66,56) 29.59,55.93 C55.2 ; C35.2 v1(47.85,69.21) ; v1(13.05,62.35) 13.13,62.28 J2.1 14.39,62.99 ; C15.2 34.89,53.46 v1(35.53,52.83) 35.91,53.21 C44.2 ; R2377.2 v1(17.35,62.6) ; v1(38.45,63.47) C12.2 C43.2 ; v1(25.66,58) 25.5,58 24.87,58.64 C59.2 C42.2 23.79,58.26 v1(23.01,57.48) ; R14.2 v1(47.72,65.17) ; C28.2 28.2,64.54 v1(27.66,64) ; C20.2 34.22,56.56 v1(33.66,56) ; C16.2 36.39,60.73 v1(35.66,60) 36.08,59.58 C66.2 ; v1(27.93,52.27) 27.76,52.45 C57.2 ; C13.2 37.29,58.63 v1(36.66,58) ; U4.2 v1(44.04,72.77) ; v1(39.51,73.9) C34.2 ; C8.2 v1(39.51,74.92)
  BOTTOM w0.406: C37.2 28.47,55.19 v1(28.66,55)
  BOTTOM w0.508: v1(29.66,62) 29.58,61.92 C38.2 ; J3.1 13.64,54.01 v1(13.18,54.48) ; J3.1 14.37,54.83 ; J3.1 15.47,54.01 ; J3.2 15.65,52.76 ; v1(35.78,77.08) 35.57,76.88 U3.2 35.57,74.29 35.22,73.93 33.39,73.93 v1(33.19,73.73) ; Q2014.2 20.39,66.59 v1(19.55,66.59) ; Q2013.2 v1(16.51,67.65)
  vias: v1(13.18,73.53) v1(13.18,65.91) v1(13.18,58.29) v1(13.18,50.67) v1(13.18,44.32) v1(13.51,69.69) v1(13.43,46.83) v1(16.73,77.08) v1(16.86,41.02) v1(18.26,42.79) v1(18.26,41.02) v1(19.02,53.59) v1(19.02,52.57) v1(20.03,53.59) v1(20.03,52.57) v1(20.46,47.72) v1(20.49,46.59) v1(20.54,77.08) v1(21.6,47.71) v1(21.67,46.58) v1(23.08,62.22) v1(24.04,51.51) v1(24.35,77.08) v1(30.78,72.69) v1(31.16,73.73) v1(32.18,73.73) v1(36.8,49.98) v1(37.94,68.83) v1(38.68,49.47) v1(39.08,69.97) v1(39.25,41.91) v1(39.49,49.5) v1(39.59,77.08) v1(40.48,69.97) v1(41.75,69.97) v1(42.13,41.9) v1(43.4,77.08) v1(43.66,52.83) v1(43.91,49.91) v1(44.16,76.19) v1(44.16,40.89) v1(44.8,61.59) v1(45.18,56.38) v1(45.18,55.24) v1(45.31,75.18) v1(45.43,64) v1(45.43,58.8) v1(45.43,42.41) v1(45.69,40.89) v1(45.94,53.21) v1(45.94,48.13) v1(46.2,77.08) v1(47.08,53.08) v1(47.21,60.32) v1(47.21,52.19) v1(47.21,50.79) v1(47.21,49.4) v1(48.35,54.6) v1(48.35,53.08) v1(48.35,52.19) v1(48.35,50.79) v1(48.35,49.4) v1(48.86,70.61) v1(48.86,68.19) v1(48.99,73.53) v1(48.99,65.91) v1(48.99,62.1) v1(48.99,58.29) v1(48.99,46.86)
VDDIO_1V8: length 11.1
  TOP w0.381: U1.J9 v1(29.66,57) ; U1.J6 29.86,59.5 v1(29.88,59.48) ; U1.M6 v1(25.66,59) ; U1.K2 v1(27.66,63)
  BOTTOM w0.305: C2.1 33.94,69.41 ; R8.1 33.94,70.42
  BOTTOM w0.508: 24.12,55.24 22.83,53.95 R16.2 21.34,51.12 R15.2
DRV0: length 6.3
  BOTTOM w0.305: R2375.2 22.56,76.3 24.68,76.3 24.96,76.58 26.33,76.58 26.69,76.22 J2045.1
DRV1: length 14.8
  ART03 w0.305: v1(17.78,74.04) 22.55,74.04 v1(23.84,75.33)
  BOTTOM w0.305: Q2013.3 17.78,68.95 Q2018.3 v1(17.78,74.04) ; R2380.2 v1(23.84,75.33) 25.12,75.33 J2045.2
IR-LED-CONTROL: length 32.3
  ART03 w0.152: v1(30.72,41.4) 30.72,41.83 29.37,43.17 26.91,43.17 22.9,47.19 19.41,47.19 17.27,49.33 v1(17.27,59.18)
  BOTTOM w0.152: v1(30.72,41.4) 30.72,41.91 30.96,42.15 J1.31 ; v1(17.27,59.18) 17.27,59.58 C31.1 15.46,59.96 J2.2
IRCUT-CONTROL1: length 34.3
  ART03 w0.152: v1(16.54,62.6) 16.54,49.29 19.85,45.97 23.53,45.97 26.71,42.79 28.77,42.79 29.93,41.63 v1(29.93,41.29)
  BOTTOM w0.152: v1(29.93,41.29) 29.93,41.57 30.56,42.2 J1.33
  BOTTOM w0.381: R2385.1 R2377.1 v1(16.54,62.6)
IRCUT-CONTROL2: length 38.8
  ART03 w0.152: v1(29.1,41.29) 29.1,41.67 28.37,42.4 26.49,42.4 23.68,45.21 19.73,45.21 16.21,48.72 16.21,61.77 15.93,62.05 15.93,62.88 16.42,63.37 v1(18.59,63.37)
  BOTTOM w0.152: J1.35 30.16,42.25 29.2,41.29 v1(29.1,41.29)
  BOTTOM w0.305: R2386.1 R2378.1 v1(18.59,63.37)
LIGHT-RESISTOR: length 38.3
  TOP w0.152: v1(37.94,44.05) 37.93,44.05 v1(24.11,44.05)
  ART03 w0.152: J2.3 15.37,59.78 15.74,59.41 15.74,48.48 19.54,44.68 23.48,44.68 v1(24.11,44.05)
  BOTTOM w0.152: v1(37.94,44.05) 37.94,43.31 37.52,42.9 J1.1
MIPI0_CKM: length 31.5
  TOP w0.14: v1(22.93,59.54) 22.93,59.41 23.15,59.2 24.86,59.2 U1.N6
  ART03 w0.114: v1(22.93,59.54) 23.17,59.3 23.64,59.3 23.97,58.97 23.97,58.22 24.17,58.02 24.17,57.22 23.97,57.01 23.97,56.67 24.17,56.47 24.17,55.67 23.97,55.46 23.97,54.2 24.58,53.59 25.36,53.59 25.72,53.22 25.72,50.24 25.84,50.12 26.16,50.12 26.27,50.24 26.27,51.5 26.57,51.8 26.97,51.8 v1(27.16,51.99)
  BOTTOM w0.14: J1.22 32.96,46.41 33.09,46.54 33.09,47.42 32.73,47.77 32.73,48.27 32.74,48.28 32.74,49.08 32.99,49.32 32.99,49.83 33.25,50.1 33.92,50.1 34.33,50.52 34.33,51.18 33.46,52.05 30.58,52.05 30.09,51.56 27.93,51.56 27.68,51.81 27.34,51.81 v1(27.16,51.99)
MIPI0_CKP: length 31.3
  TOP w0.14: U1.N7 24.86,58.8 23.23,58.8 v1(22.93,58.51)
  ART03 w0.114: v1(22.93,58.51) 22.93,58.82 23.09,58.99 23.51,58.99 23.65,58.84 23.65,58.09 23.86,57.89 23.86,57.35 23.65,57.15 23.65,56.54 23.86,56.34 23.86,55.8 23.65,55.6 23.65,54.07 24.45,53.27 25.23,53.27 25.41,53.09 25.41,52.76 25.24,52.59 25.24,52.14 25.41,51.97 25.41,51.51 25.24,51.35 25.24,50.89 25.41,50.73 25.41,50.1 25.71,49.8 26.29,49.8 26.59,50.1 26.59,51.37 26.7,51.49 26.86,51.49 27.16,51.19 v1(27.16,51.19)
  BOTTOM w0.14: J1.24 32.57,45.99 32.57,46.58 32.69,46.7 32.69,47.26 32.34,47.61 32.34,48.44 32.35,48.44 32.35,49.24 32.59,49.49 32.59,49.99 33.09,50.49 33.75,50.49 33.94,50.68 33.94,51.01 33.3,51.65 30.75,51.65 30.25,51.16 27.77,51.16 27.52,51.42 27.39,51.42 v1(27.16,51.19)
MIPI0_D0M: length 33.8
  TOP w0.14: U1.N4 24.87,61.21 23.2,61.21 v1(22.93,61.47)
  ART03 w0.114: v1(22.93,61.47) 22.79,61.34 22.37,61.34 22,60.97 22,54.35 24.54,51.81 24.54,49.73 28.24,46.03 34.02,46.03 36.14,48.15 36.14,48.41 v1(36.47,48.74)
  BOTTOM w0.14: v1(36.47,48.74) 36.17,48.44 36.17,48.16 35.36,47.35 J1.10
MIPI0_D0P: length 33.7
  TOP w0.14: U1.N5 25.16,60.53 24.87,60.82 23.29,60.82 v1(22.93,60.46)
  ART03 w0.114: v1(35.58,48.74) 35.78,48.53 35.78,48.25 33.89,46.35 28.37,46.35 24.86,49.86 24.86,51.94 24.44,52.36 24.44,52.66 24.27,52.83 23.96,52.83 23.74,53.06 23.74,53.34 23.54,53.54 23.26,53.54 23.03,53.77 23.03,53.87 23.03,54.02 22.9,54.15 22.75,54.15 22.75,54.15 22.65,54.15 22.32,54.48 22.32,54.95 22.45,55.08 22.45,55.31 22.32,55.44 22.32,55.75 22.47,55.91 22.47,56.14 22.32,56.29 22.32,56.79 22.47,56.94 22.47,57.17 22.32,57.32 22.32,57.71 22.45,57.83 22.45,58.06 22.32,58.19 22.32,58.77 22.45,58.9 22.45,59.13 22.32,59.26 22.32,59.74 22.45,59.87 22.45,60.09 22.32,60.22 22.32,60.84 22.5,61.02 22.69,61.02 22.93,60.77 v1(22.93,60.46)
  BOTTOM w0.14: v1(35.58,48.74) 35.78,48.54 35.78,48.33 34.97,47.52 34.97,45.99 J1.12
MIPI0_D1M: length 31.8
  TOP w0.14: v1(22.98,56.37) 23.33,56.37 24.43,57.48 25.14,57.48 U1.N8
  ART04 w0.114: v1(37.76,47.83) 37.76,47.81 37.49,47.54 37.49,47.05 36.9,46.46 34.02,46.46 33.41,45.85 28.14,45.85 27.75,46.24 27.75,46.55 27.63,46.67 27.35,46.67 27.23,46.55 27.23,46.15 26.93,45.85 26.33,45.85 22,50.18 22,55.76 22.43,56.19 22.8,56.19 v1(22.98,56.37)
  BOTTOM w0.14: v1(37.76,47.83) 37.49,47.56 37.49,47.03 37.1,46.64 36.75,46.64 36.56,46.45 J1.4
MIPI0_D1P: length 31.7
  TOP w0.14: U1.N9 25.16,56.82 24.9,57.08 24.59,57.08 23.49,55.98 23.34,55.98 22.98,55.62 v1(22.98,55.34)
  ART04 w0.114: v1(22.98,55.34) 23.13,55.49 23.13,55.72 22.98,55.87 22.57,55.87 22.32,55.63 22.32,55.04 22.45,54.91 22.45,54.68 22.32,54.55 22.32,50.31 26.46,46.17 26.8,46.17 26.91,46.29 26.91,46.68 27.22,46.98 27.77,46.98 28.07,46.68 28.07,46.38 28.27,46.17 33.28,46.17 33.89,46.78 36.77,46.78 37.17,47.19 37.17,47.53 v1(36.87,47.83)
  BOTTOM w0.14: J1.6 36.16,46.61 36.58,47.03 36.93,47.03 37.1,47.2 37.1,47.6 v1(36.87,47.83)
MIPI0_D2M: length 33.8
  TOP w0.152: U1.M4 v1(25.66,62)
  ART03 w0.114: v1(31.85,48.65) 31.57,48.92 31.4,48.92 30.7,49.63 30.37,49.63 29.64,50.36 28.93,50.36 28.82,50.25 28.82,49.75 28.52,49.45 27.86,49.45 27.46,49.84 27.46,50.68 28.37,51.58 30.7,51.58 31.53,52.41 31.53,53.71 31.21,54.03 30.38,54.03 29.13,52.79 27.12,52.79 24.8,55.11 24.8,59.37 23.59,60.57 23.59,61.34 23.96,61.7 25.37,61.7 v1(25.66,62)
  BOTTOM w0.14: J1.28 31.75,45.99 31.75,46.58 31.66,46.68 31.66,48.46 v1(31.85,48.65)
MIPI0_D2P: length 33.7
  TOP w0.152: U1.M5 v1(25.66,61)
  ART03 w0.114: v1(31.87,49.41) 31.7,49.24 31.53,49.24 30.83,49.94 30.5,49.94 29.77,50.68 28.8,50.68 28.5,50.38 28.5,49.88 28.39,49.77 27.99,49.77 27.78,49.97 27.78,50.55 28.5,51.26 30.83,51.26 31.84,52.28 31.84,53.84 31.34,54.35 30.24,54.35 29,53.1 27.25,53.1 25.11,55.24 25.11,59.5 23.91,60.71 23.91,61.2 24.09,61.39 25.27,61.39 v1(25.66,61)
  BOTTOM w0.14: J1.30 31.36,46.42 31.26,46.51 31.26,48.78 31.87,49.39 v1(31.87,49.41)
MIPI0_D3M: length 31.5
  TOP w0.14: U1.M8 v1(25.66,57)
  ART03 w0.114: v1(25.66,57) 26.16,56.5 26.16,55.57 26.38,55.35 27.13,55.35 27.27,55.5 27.27,56.13 27.65,56.51 28.67,56.51 29.05,56.13 29.05,55.82 29.37,55.49 34.33,55.49 34.7,55.12 34.7,54.46 34.33,54.08 33.05,54.08 32.85,53.88 32.85,53.57 33.09,53.32 34.37,53.32 35.02,52.67 35.02,50.3 34.66,49.93 34.06,49.93 33.7,50.3 33.7,51.77 33.52,51.95 33.09,51.95 32.92,51.78 32.92,48.85 33.13,48.65 33.51,48.65 v1(33.67,48.81)
  BOTTOM w0.14: v1(33.67,48.81) 34.17,48.31 34.17,45.99 J1.16
MIPI0_D3P: length 31.4
  TOP w0.14: U1.M9 25.82,56.5 25.66,56.35 v1(25.66,56)
  ART03 w0.114: v1(33.67,48.01) 33.67,48.1 33.45,48.33 33,48.33 32.61,48.72 32.61,49.02 32.4,49.22 32.4,49.5 32.61,49.7 32.61,51.91 32.96,52.27 33.65,52.27 34.02,51.9 34.02,50.43 34.19,50.25 34.52,50.25 34.7,50.43 34.7,50.77 34.59,50.89 34.59,51.21 34.7,51.32 34.7,51.64 34.59,51.75 34.59,52.07 34.7,52.18 34.7,52.54 34.24,53 32.96,53 32.53,53.44 32.53,54.01 32.92,54.4 34.2,54.4 34.38,54.59 34.38,54.99 34.19,55.18 33.87,55.18 33.73,55.04 33.41,55.04 33.27,55.18 32.95,55.18 32.76,54.99 32.55,54.99 32.36,55.18 32.04,55.18 31.85,54.99 31.63,54.99 31.44,55.18 31.13,55.18 30.96,55.01 30.69,55.01 30.53,55.18 30.21,55.18 30.05,55.01 29.78,55.01 29.61,55.18 29.24,55.18 28.73,55.68 28.73,56 28.54,56.19 27.79,56.19 27.59,56 27.59,55.37 27.26,55.04 27.1,55.04 26.94,54.88 26.61,54.88 26.46,55.04 26.24,55.04 25.84,55.44 25.84,55.82 v1(25.66,56)
  BOTTOM w0.14: v1(33.67,48.01) 33.78,47.9 33.78,46.16 33.77,46.14 33.77,45.99 J1.18
MIPI1_CKM: length 21.1
  TOP w0.152: U1.L6 v1(26.66,60)
  ART04 w0.114: v1(26.66,60) 26.46,59.8 25.28,59.8 24.85,59.37 24.85,58.34 24.54,58.04 24.54,57.01 24.85,56.71 24.85,55.4 23.64,54.19 23.64,52.68 24.58,51.74 24.58,48.86 25.08,48.37 25.68,48.37 26.48,49.17 26.71,49.17 v1(26.94,48.95)
  BOTTOM w0.14: v1(26.94,48.95) 27.38,48.95 27.76,48.57 27.76,47.44 27.63,47.31 27.63,46.54 27.76,46.41 J1.48
MIPI1_CKP: length 21.1
  TOP w0.152: U1.L7 v1(26.66,59)
  ART04 w0.114: v1(26.94,49.75) 26.68,49.49 26.35,49.49 25.55,48.69 25.21,48.69 24.9,49 24.9,51.87 23.96,52.81 23.96,54.06 25.16,55.27 25.16,56.84 24.86,57.14 24.86,57.91 25.16,58.21 25.16,59.24 25.41,59.48 26.33,59.48 26.66,59.15 v1(26.66,59)
  BOTTOM w0.14: v1(26.94,49.75) 27.33,49.36 27.53,49.36 28.16,48.73 28.16,47.28 28.03,47.15 28.03,46.61 28.16,46.48 J1.46
MIPI1_D0M: length 22.6
  TOP w0.152: U1.K5 v1(27.66,60)
  ART04 w0.114: v1(27.66,60) 27.85,59.81 28.67,59.81 29.18,59.3 29.18,55.69 30.83,54.04 30.83,51.17 31.02,50.97 31.29,50.97 v1(31.46,51.15)
  BOTTOM w0.14: J1.54 26.56,46.58 26.56,47.63 25.83,48.36 25.83,50.01 26.51,50.69 27.37,50.69 27.38,50.7 30.34,50.7 30.54,50.9 30.54,50.9 31.21,50.9 v1(31.46,51.15)
MIPI1_D0P: length 22.5
  TOP w0.152: U1.K6 v1(27.66,59)
  ART04 w0.114: v1(31.47,50.26) 31.13,50.59 30.95,50.59 30.51,51.04 30.51,53.91 28.86,55.56 28.86,56.82 28.67,57.01 28.67,57.42 28.86,57.61 28.86,58.07 28.64,58.28 28.64,58.64 28.86,58.85 28.86,59.17 28.54,59.49 28.15,59.49 v1(27.66,59)
  BOTTOM w0.14: J1.52 26.96,46.58 26.96,47.79 26.22,48.52 26.22,49.84 26.67,50.29 27.53,50.29 27.55,50.31 30.51,50.31 30.7,50.5 31.22,50.5 v1(31.47,50.26)
MIPI1_D1M: length 20.1
  TOP w0.152: U1.K7 v1(27.66,58)
  ART04 w0.114: v1(27.66,58) 28.19,57.47 28.19,56.46 28.06,56.33 28.06,54.33 27.49,53.75 27.49,53.39 27.76,53.12 28.98,53.12 29.37,52.73 29.37,51.75 29.05,51.43 28.54,51.43 28.38,51.27 28.38,50.93 28.69,50.62 30.24,50.62 31.32,49.54 31.32,48.53 30.97,48.18 28.93,48.18 v1(28.69,47.94)
  BOTTOM w0.14: v1(28.69,47.94) 28.86,47.76 28.86,47.28 29.06,47.08 29.06,46.65 28.96,46.55 J1.42
MIPI1_D1P: length 20
  TOP w0.152: U1.K8 27.93,57.5 27.66,57.23 v1(27.66,57)
  ART04 w0.114: v1(28.69,48.74) 28.93,48.5 30.84,48.5 31.01,48.66 31.01,49.41 30.81,49.6 30.52,49.6 30.29,49.84 30.29,50.13 30.11,50.3 28.56,50.3 28.06,50.79 28.06,51.4 28.4,51.75 28.92,51.75 29.05,51.88 29.05,52.6 28.85,52.8 27.63,52.8 27.17,53.26 27.17,53.89 27.25,53.96 27.25,54.15 27.43,54.33 27.62,54.33 27.74,54.46 27.74,54.69 27.58,54.86 27.58,55.19 27.74,55.35 27.74,55.63 27.59,55.79 27.59,56.09 27.74,56.24 27.74,56.46 27.87,56.59 27.87,56.79 v1(27.66,57)
  BOTTOM w0.14: J1.40 29.36,46.58 29.45,46.67 29.45,47.25 29.26,47.44 29.26,48.17 v1(28.69,48.74)
MIPI1_D2M: length 21.4
  TOP w0.152: U1.L4 v1(27.66,62)
  ART04 w0.114: v1(27.66,62) 27.32,61.66 27.16,61.66 25.99,60.49 24.75,60.49 23.62,59.35 23.62,55.19 22.83,54.4 22.83,50.67 23.44,50.06 23.95,50.06 24.04,49.96 v1(24.04,49.8)
  BOTTOM w0.14: v1(24.04,49.8) 24.04,49.83 24.17,49.96 24.51,49.96 24.77,49.69 24.77,46.98 25.31,46.44 J1.60
MIPI1_D2P: length 21.4
  TOP w0.152: U1.L5 v1(27.66,61)
  ART04 w0.114: v1(24.04,50.71) 24.04,50.54 23.88,50.37 23.57,50.37 23.15,50.8 23.15,54.27 23.93,55.06 23.93,59.22 24.89,60.17 26.12,60.17 27.3,61.34 27.5,61.34 27.66,61.18 v1(27.66,61)
  BOTTOM w0.14: v1(24.04,50.71) 24.04,50.44 24.14,50.35 24.67,50.35 25.16,49.86 25.16,47.14 25.76,46.54 J1.58
MIPI1_D3M: length 20
  TOP w0.152: U1.L8 v1(26.66,57)
  ART04 w0.114: v1(29.46,49.01) 29.15,49.32 28.18,49.32 27.13,50.38 25.69,50.38 25.3,50.76 25.3,51.57 25.6,51.87 26.22,51.87 26.33,51.99 26.33,52.31 26.22,52.42 25.03,52.42 24.68,52.77 24.68,53.35 24.98,53.65 26.21,53.65 26.32,53.77 26.32,54 26.21,54.12 25.67,54.12 25.37,54.42 25.37,54.94 26.16,55.72 26.16,56.21 26.66,56.71 v1(26.66,57)
  BOTTOM w0.14: J1.36 30.16,46.77 30.17,46.77 30.17,47.01 30.26,47.11 30.26,48.01 29.46,48.81 v1(29.46,49.01)
MIPI1_D3P: length 20
  TOP w0.152: v1(26.66,56) 26.66,56.33 26.83,56.5 U1.L9
  ART04 w0.114: v1(29.46,49.81) 29.29,49.64 28.32,49.64 28.06,49.9 28.06,50.21 27.86,50.41 27.55,50.41 27.26,50.69 26.87,50.69 26.64,50.92 26.33,50.92 26.1,50.69 25.82,50.69 25.62,50.89 25.62,51.44 25.74,51.56 26.35,51.56 26.65,51.86 26.65,52.44 26.35,52.74 25.16,52.74 25,52.9 25,53.22 25.11,53.33 26.34,53.33 26.64,53.64 26.64,54.14 26.34,54.44 25.8,54.44 25.69,54.55 25.69,54.8 25.87,54.99 26.16,54.99 26.36,55.19 26.36,55.48 26.47,55.59 26.47,55.81 v1(26.66,56)
  BOTTOM w0.14: J1.34 30.56,46.85 30.66,46.94 30.66,48.18 29.96,48.87 29.96,49.22 29.46,49.72 v1(29.46,49.81)
PWM: length 21.5
  ART03 w0.254: v1(27.39,41.84) 25.36,41.84 23.01,44.19 19.27,44.19 15.33,48.13 15.33,51.26 15.08,51.51 J3.3
  BOTTOM w0.203: J1.39 29.36,42.46 29.36,42.46 29.36,42.42 29.18,42.25 27.8,42.25 v1(27.39,41.84)
SENSOR_CLK: length 46.9
  ART03 w0.152: v1(33.65,41.82) 33.65,42.41 31.53,44.53 27.25,44.53 22.77,49.01 19.4,49.01 17.85,50.57 17.85,61.34 25.34,68.83 28.4,68.83 v1(28.96,68.27)
  BOTTOM w0.152: v1(33.65,41.82) 33.76,41.92 J1.17 ; R1.2 v1(28.96,68.27)
SENSOR_RESET: length 53.9
  ART04 w0.152: v1(29.97,68.27) 29.39,67.69 24.1,67.69 16.25,59.84 16.25,50.7 17.73,49.22 19.19,49.22 19.95,48.45 19.95,46.27 20.84,45.39 23.56,45.39 25.51,43.44 32.94,43.44 34.3,42.08 34.3,41.41 v1(34.04,41.15)
  BOTTOM w0.152: J1.15 34.16,42.27 34.18,42.25 34.18,41.29 v1(34.04,41.15) ; v1(29.97,68.27) 29.98,68.27 C56.1 R2.2
SPI0_CLK: length 48.5
  ART03 w0.152: v1(27.94,68.27) 26.18,68.27 18.48,60.58 18.48,55.27 19.4,54.35 20.41,54.35 21.75,53.01 21.75,50.86 27.43,45.18 33.77,45.18 37.13,41.82 v1(38.33,41.82)
  BOTTOM w0.152: v1(38.33,41.82) 38.21,41.7 36.73,41.7 36.16,42.27 J1.5 ; R5.2 v1(27.94,68.27)
SPI0_CS: length 53.2
  ART04 w0.152: v1(31.88,68.27) 31.88,67.26 31.54,66.92 24.61,66.92 17.87,60.19 17.87,51.47 18.55,50.79 20.37,50.79 20.81,50.35 20.81,49.29 22.11,47.99 22.11,47.18 22.64,46.65 23.43,46.65 25.72,44.36 33.84,44.36 35.92,42.29 v1(35.92,41.33)
  BOTTOM w0.152: J1.9 35.36,42.2 35.91,41.65 35.91,41.4 35.92,41.39 v1(35.92,41.33) ; R6.2 v1(31.88,68.27)
SPI0_MISO: length 56.2
  ART04 w0.152: v1(33.91,68.27) 33.26,68.92 31.41,68.92 31.12,68.62 31.12,67.51 30.91,67.3 24.22,67.3 16.74,59.82 16.74,51.46 18.48,49.72 19.59,49.72 21.08,48.23 21.08,46.35 21.43,46 23.52,46 25.62,43.89 33.52,43.89 35.12,42.3 v1(35.12,41.67)
  BOTTOM w0.152: J1.11 34.96,41.83 v1(35.12,41.67) ; R3.2 v1(33.91,68.27)
SPI0_MOSI: length 56.1
  ART04 w0.152: v1(32.89,68.27) 32.89,66.97 32.41,66.49 24.94,66.49 22.19,63.75 22.19,62.1 21.81,61.72 20.03,61.72 18.31,59.99 18.31,52.26 18.66,51.91 20.44,51.91 21.27,51.08 21.27,49.48 22.51,48.24 22.51,47.62 23.09,47.05 23.7,47.05 25.98,44.78 34.21,44.78 37.29,41.69 v1(37.29,41.16)
  BOTTOM w0.152: v1(37.29,41.16) 36.84,41.16 35.76,42.24 J1.7 ; R4.2 v1(32.89,68.27)
VI_POWER1: length 23.3
  ART04 w0.381: v1(32.41,41.13) 32.41,41.19 32.4,41.2 32.4,42.21 31.84,42.78 24.41,42.78 22.69,44.5 20.69,44.5 19.07,46.13 19.07,48.01 v1(19.34,48.28)
  BOTTOM w0.152: J1.21 32.96,42.28 32.4,41.73 32.4,41.2 32.41,41.19 v1(32.41,41.13)
  BOTTOM w0.305: R15.1 21.34,48.93 20.79,48.38 19.44,48.38 v1(19.34,48.28)
VI_POWER2: length 16.9
  ART03 w0.381: v1(31.52,41.28) 31.66,41.28 32.14,41.75 32.14,42.65 30.98,43.8 27.05,43.8 23.12,47.73 v1(23.12,47.88)
  BOTTOM w0.152: v1(31.52,41.28) 32.56,42.31 J1.23
  BOTTOM w0.305: v1(23.12,47.88) 22.83,48.16 R16.1
$3N29: length 2.5
  BOTTOM w0.381: U3.3 37.1,75.13 37.31,74.92 C8.1 R9.2
$3N34: length 2.5
  BOTTOM w0.381: U3.4 36.52,73.7 36.73,73.9 C34.1
$3N39: length 4.5
  BOTTOM w0.381: U3.5 35.57,71.32 35.81,71.08 R8.2 C2.2 35.81,68.32 R12.1
$3N58: length 1.4
  BOTTOM w0.381: U4.4 45.94,68.87 46.28,69.21 C35.1
$3N64: length 3.1
  BOTTOM w0.381: R7.2 C1.1 45.46,70.33 44.99,70.8 U4.3
$3N75: length 1.3
  BOTTOM w0.381: R10.1 45.21,65.4 R11.2
$3N77: length 4.9
  BOTTOM w0.381: R14.1 46.75,66.57 R10.2 45.54,66.54 C53.2 44.44,67.3 44.04,67.71 U4.5
$4N188: length 1.5
  TOP w0.381: U1.B7 v1(35.66,58)
  BOTTOM w0.381: v1(35.66,58) 35.93,57.73 C41.1
$4N192: length 1.5
  TOP w0.305: U1.D5 v1(34.66,61)
  BOTTOM w0.381: C40.1 34.17,61.49 v1(34.66,61)
$4N194: length 1.4
  TOP w0.381: U1.D6 v1(34.66,60)
  BOTTOM w0.381: v1(34.66,60) 34.18,59.52 C39.1
$4N196: length 1.4
  TOP w0.381: U1.C7 v1(35.66,59)
  BOTTOM w0.381: C17.1 35.2,58.54 v1(35.66,59)
$4N210: length 3.5
  TOP w0.152: U1.F2 31.67,63.99 31.67,64.84 31.88,65.05 v1(31.88,65.94)
  BOTTOM w0.152: R6.1 v1(31.88,65.94)
$4N211: length 3.7
  TOP w0.152: v1(27.94,65.68) 28.67,64.95 28.67,63.99 U1.J2
  BOTTOM w0.152: R5.1 v1(27.94,65.68)
$4N212: length 2.5
  TOP w0.152: U1.F1 32.63,64.97 32.63,65.68 v1(32.89,65.94)
  BOTTOM w0.152: R4.1 v1(32.89,65.94)
$4N213: length 2.6
  TOP w0.152: v1(33.91,65.94) 33.91,65.03 33.38,64.5 U1.E1
  BOTTOM w0.152: R3.1 v1(33.91,65.94)
$4N214: length 2.3
  TOP w0.152: U1.J1 29.16,65.48 v1(28.96,65.68)
  BOTTOM w0.152: R1.1 v1(28.96,65.68)
$4N215: length 3.5
  TOP w0.152: U1.H2 30.65,63.99 30.65,65.91 v1(30.7,65.96)
  BOTTOM w0.152: v1(30.7,65.96) 30.96,66.21 R2.1
$5N8: length 6.9
  BOTTOM w0.305: C2404.2 Q2018.1 18.73,73.62 R2381.1 R2390.2
$5N9: length 7.6
  BOTTOM w0.305: Q2019.1 23.81,71.41 24.21,71.81 C2405.2 25.62,72.03 R2389.2 25.62,73.68 24.79,74.51 R2380.1
$5N33: length 8
  BOTTOM w0.305: R2381.2 R2375.1 21.59,73.93 Q2019.3 22.86,69.97 Q2014.3
$5N37: length 1.9
  BOTTOM w0.305: Q2013.1 18.54,65.29 R2385.2
$5N49: length 1.9
  BOTTOM w0.305: Q2014.1 22.61,65.33 R2386.2

## Copper pours and planes (outline as drawn; the poured copper is in the pictures)
3V3 on TOP (solid shape): outline of 2523 points within 13.68,40.52 48.61,77.21
3V3 on BOTTOM (solid shape): 23.93,43.51 24.84,43.51 25.09,43.26 25.35,43.26 25.35,43.26 26.26,43.26 26.26,42.03 25.56,41.33 19.34,41.33 19,41.67 19,43.66 19.86,43.66 19.86,44 19.56,44 19.56,43.66 19,43.66 19,44.28 19.07,44.35 20.01,44.35 20.23,44.57 22.86,44.57
3V3 on BOTTOM (solid shape): 20.3,51.66 20.3,49.45 19.75,48.91 15.37,48.91 14.93,49.35 13.79,49.35 13.66,49.47 13.66,50.62 13.79,50.74 14.95,50.74 15.26,51.05 17.11,51.05 17.11,51.43 16.73,51.43 16.73,51.05 16.48,51.05 16.48,51.43 16.1,51.43 16.1,51.05 15.26,51.05 15.97,51.76 20.19,51.76
3V3 on BOTTOM (solid shape): 43.4,75.69 43.4,72.38 43.45,72.33 43.45,70.67 43.39,70.61 42.78,70.61 42.64,70.74 42.64,71.62 42.51,71.75 41.24,71.75 40.86,72.13 42.26,72.13 42.26,72.51 41.88,72.51 41.88,72.13 41.62,72.13 41.62,72.51 41.24,72.51 41.24,72.13 40.1,72.13 39.97,72.26 39.97,75.56 40.23,75.81 43.27,75.81
3V3 on BOTTOM (solid shape): 34.93,77.31 34.93,74.43 33.86,74.43 33.72,74.58 33.72,75.76 33.72,75.8 33.69,75.83 32.25,75.83 32.16,75.74 31.2,75.74 30.99,75.53 28.49,75.53 28.37,75.64 28.37,76.22 32.86,76.22 32.86,76.25 33.5,76.25 33.5,76.55 33.09,76.55 33.09,76.25 32.86,76.25 32.86,76.58 32.53,76.58 32.53,76.22 28.37,76.22 28.37,77.25 28.52,77.39 34.86,77.39
3V3 on BOTTOM (solid shape): 43.15,49.65 43.15,46.3 43.74,45.7 44.41,45.7 44.67,45.44 44.67,44.32 44.04,43.68 41.47,43.68 40.89,44.27 40.89,45.66 40.66,45.89 40.33,45.89 40.2,46.02 40.2,46.32 40.86,46.32 40.86,46.6 40.51,46.6 40.51,46.32 40.2,46.32 40.2,46.88 40.86,46.88 40.86,47.16 40.51,47.16 40.51,46.88 40.2,46.88 40.2,49.5 40.73,50.03 42.77,50.03
3V3 on BOTTOM (solid shape): 15.84,58.16 18.38,58.16 19.14,57.4 20.29,57.4 20.54,57.14 20.54,55.49 20.41,55.37 18.76,55.37 18.64,55.49 18.64,56 18.51,56.13 17.11,56.13 16.99,56 16.35,56 16.22,56.13 14.19,56.13 13.94,56.38 17.11,56.38 17.11,56.76 16.73,56.76 16.73,56.38 16.48,56.38 16.48,56.76 16.1,56.76 16.1,56.38 13.94,56.38 13.81,56.51 13.81,58.92 13.94,59.05 14.95,59.05
AVDD_2V9 on BOTTOM (solid shape): 39.8,63.55 39.8,61.11 38.8,60.12 38.73,60.12 38.37,59.76 38.37,59.23 38.27,59.13 37.61,59.13 37.51,59.23 37.51,60.09 38.93,61.51 38.93,63.65 39.69,63.65
AVDD_2V9 on BOTTOM (solid shape): 43.52,69.47 43.52,67.98 43.53,67.98 43.53,67.43 42.64,66.54 42.64,63.37 42.45,63.18 39.4,63.18 38.19,64.38 38.19,67.81 38.32,67.94 41.62,67.94 42,68.32 42,69.34 42.26,69.59 43.4,69.59
AVDD_2V9 on BOTTOM (solid shape): 40.99,63.62 40.99,60.04 40.94,59.98 40.87,59.89 40.81,59.8 40.76,59.7 40.71,59.6 40.68,59.49 40.64,59.39 40.62,59.28 40.61,59.17 40.6,59.06 40.6,58.94 40.61,58.83 40.62,58.72 40.64,58.61 40.68,58.51 40.71,58.4 40.76,58.3 40.81,58.2 40.87,58.11 40.94,58.02 40.99,57.96 40.99,56.51 39.21,54.73 37.59,54.73 37.43,54.88 37.43,55.11 38.19,55.11 38.19,55.49 37.81,55.49 37.81,55.11 37.43,55.11 37.43,55.69 38.2,55.69 38.2,56.06 37.81,56.06 37.81,55.69 37.43,55.69 37.43,56.05 37.81,56.43 37.81,57.32 37.84,57.35 39.57,57.35 39.85,57.63 39.85,59.58 40.15,59.89 40.15,60.7 40.1,60.75 40.1,63.6 40.18,63.67 40.94,63.67
AVDD_2V9 on ART03 (solid shape): 40.1,64.51 40.1,62.89 38.12,60.9 37.56,60.9 37.43,61.03 37.43,61.79 39.08,63.44 39.08,64.51 39.21,64.64 39.97,64.64
AVDD_2V9 on ART03 (solid shape): 41.62,64.38 41.62,60.7 38.45,57.53 37.94,57.53 37.81,57.65 37.81,58.92 38.89,60 38.89,60.4 39.29,60.4 39.29,60.34 39.3,60.28 39.31,60.23 39.33,60.17 39.37,60.12 39.4,60.08 39.45,60.03 39.49,60 39.55,59.97 39.6,59.95 39.66,59.94 39.72,59.94 39.78,59.94 39.84,59.95 39.89,59.97 39.94,60 39.99,60.03 40.04,60.08 40.07,60.12 40.1,60.17 40.13,60.23 40.14,60.28 40.15,60.34 40.15,60.4 40.14,60.46 40.13,60.52 40.1,60.57 40.07,60.62 40.04,60.67 39.99,60.71 39.94,60.74 39.89,60.77 39.84,60.79 39.78,60.8 39.72,60.8 39.66,60.8 39.6,60.79 39.55,60.77 39.49,60.74 39.45,60.71 39.4,60.67 39.37,60.62 39.33,60.57 39.31,60.52 39.3,60.46 39.29,60.4 38.89,60.4 38.89,60.7 40.48,62.29 40.48,64.38 40.61,64.51 41.5,64.51
AVDD_2V9 on ART04 (solid shape): outline of 146 points within 34.26,54.35 42.77,64.64
DVDD_1V2 on BOTTOM (solid shape): outline of 372 points within 28.29,51.3 43.02,63.98
GND on TOP (solid shape): 18.13,77.21 18.13,75.43 14.57,71.88 14.57,65.65 13.43,64.51 13.43,49.27 13.43,49.27 13.43,48.89 18.56,43.76 18.56,43.06 18.56,43.06 18.56,40.79 18.41,40.63 14.7,40.63 12.92,42.41 12.92,45.71 13.05,45.84 13.05,50.16 12.79,50.41 12.79,67.56 13.3,68.07 13.3,72 12.92,72.38 12.92,75.31 15.08,77.46 17.87,77.46
GND on TOP (solid shape): outline of 623 points within 24.26,40.63 49.5,70.99
GND on BOTTOM (solid shape): 44.43,73.01 44.43,69.98 44.27,69.82 42.11,69.82 41.75,69.46 41.75,68.45 41.62,68.32 39.59,68.32 39.46,68.45 37.69,68.45 37.56,68.57 37.56,70.72 42.19,70.72 42.19,71.1 41.84,71.1 41.84,70.72 37.56,70.72 37.56,70.72 41.66,70.72 41.66,71.1 41.25,71.1 41.25,70.72 37.56,70.72 37.56,71.37 37.69,71.5 42.29,71.5 42.4,71.39 42.4,70.69 42.69,70.4 43.48,70.4 43.66,70.58 43.66,73.02 43.78,73.15 44.29,73.15
GND on BOTTOM (solid shape): 33.48,75.51 33.48,72.49 33.44,72.44 32.17,72.44 32.02,72.29 30.29,72.29 30.19,72.38 30.19,72.64 32.23,72.64 32.23,72.89 31.84,72.89 31.84,72.64 31.59,72.64 31.59,72.89 31.34,72.89 31.34,72.64 30.19,72.64 30.19,74.86 33.36,74.86 33.36,75.2 33.1,75.2 33.1,74.86 32.92,74.86 32.92,75.2 32.62,75.2 32.62,74.86 30.19,74.86 30.19,75.05 30.32,75.18 32.15,75.18 32.51,75.53 33.46,75.53
GND on BOTTOM (solid shape): 18.92,47.85 18.93,47.86 19.22,47.86 19.24,47.85 19.3,47.85 19.36,47.85 19.41,47.85 19.46,47.86 19.52,47.88 19.57,47.91 19.61,47.94 19.65,47.98 19.67,48 22.24,48 23.4,46.84 23.4,45.47 22.99,45.05 20.35,45.05 19.89,44.59 18.76,44.59 18.76,44.57 18.64,44.44 18.64,43.68 18.62,43.67 18.62,40.67 18.46,40.51 15.21,40.51 15.14,40.51 14.99,40.52 14.85,40.53 14.71,40.56 14.57,40.59 14.44,40.63 14.3,40.67 14.17,40.73 14.04,40.79 13.92,40.86 13.8,40.94 13.68,41.02 13.57,41.11 13.46,41.2 13.36,41.3 13.27,41.41 13.18,41.52 13.1,41.64 13.02,41.76 12.95,41.88 12.89,42.01 12.83,42.14 12.79,42.28 12.75,42.41 12.72,42.55 12.69,42.69 12.68,42.83 12.67,42.98 12.67,43.05 12.67,44.95 19.4,44.95 19.4,45.33 19.02,45.33 19.02,44.95 12.67,44.95 12.67,45.11 12.88,45.32 12.88,45.33 13.05,45.5 13.05,48 13.43,48.38 18.38,48.38
GND on BOTTOM (solid shape): 24.86,77.11 24.53,76.78 18.41,76.78 15.41,73.78 15.41,71.22 15.08,70.89 15.08,70.36 15.41,70.03 15.41,62.99 15.16,62.73 14.95,62.73 14.78,62.83 14.58,62.86 14.2,62.86 13.78,62.68 13.62,62.25 13.31,61.95 12.95,61.95 12.79,62.1 12.79,67.43 13.18,67.81 13.18,72.13 12.67,72.64 12.67,74.95 13.41,76.75 15.21,77.49 24.86,77.49
GND on BOTTOM (solid shape): 18.31,54.84 18.45,54.7 20.32,54.7 20.54,54.48 20.54,52.27 20.41,52.14 17.09,52.14 16.96,52.01 15.92,52.01 15.49,52.45 17.11,52.45 17.11,52.7 16.73,52.7 16.73,52.45 16.48,52.45 16.48,52.7 16.22,52.7 16.22,52.45 15.49,52.45 15.41,52.52 15.41,53.21 15.12,53.5 15.12,53.85 15.13,53.88 15.14,53.95 15.14,54.01 15.14,54.08 15.13,54.15 15.11,54.21 15.08,54.28 15.05,54.33 15.01,54.39 14.96,54.44 14.91,54.48 14.85,54.52 14.79,54.55 14.73,54.57 14.66,54.59 14.59,54.6 14.56,54.6 14.18,54.6 14.14,54.6 14.07,54.59 14.01,54.57 13.94,54.55 13.88,54.52 13.82,54.48 13.77,54.43 13.72,54.38 13.68,54.32 13.65,54.26 13.62,54.2 13.6,54.13 13.59,54.06 13.59,53.99 13.6,53.92 13.6,53.89 13.48,53.77 13.07,53.77 13.02,53.82 13.02,54.3 13.03,54.31 13.03,54.94 16.43,54.94 16.43,54.96 17.04,54.96 17.04,55.29 16.68,55.29 16.68,54.96 16.43,54.96 16.43,55.32 16.07,55.32 16.07,54.94 13.03,54.94 13.03,55.5 13.22,55.69 18.31,55.69
GND on BOTTOM (solid shape): outline of 196 points within 35.6,40.51 49.65,77.49
GND on GND02 (solid shape): outline of 7650 points within 12.67,40.51 49.65,77.49
GND on ART03 (solid shape): outline of 2086 points within 12.67,40.51 49.24,77.34
GND on ART04 (solid shape): outline of 2040 points within 12.67,40.51 49.65,77.48
GND on POWER05 (solid shape): outline of 7519 points within 12.67,40.51 49.65,77.49
VDDIO_1V8 on BOTTOM (solid shape): outline of 794 points within 23.37,54.61 35.02,73.4

## Text on the board
BOTTOM: IMX178_LV_REFB VER.A ARTWORK BOTTOM
Ref Des/Silkscreen Bottom: A | B | IMX178_LV_REFB VER.A SILKSCREEN BOTTOM
User.Comments: 46 | 37 | 36 | 24 | 13 | 14 | 23 | IMX178_LV_REFB VER.A SOLDMASK TOP | IMX178_LV_REFB VER.A SOLDMASK BOTTOM
TOP: IMX178_LV_REFB VER.A ARTWORK TOP
Ref Des/Silkscreen Top: IMX178_LV_REFB VER.A | IMX178_LV_REFB VER.A SILKSCREEN TOP
GND02: IMX178_LV_REFB VER.A ARTWORK LAYER02
ART03: IMX178_LV_REFB VER.A ARTWORK LAYER03
ART04: IMX178_LV_REFB VER.A ARTWORK LAYER04
POWER05: IMX178_LV_REFB VER.A ARTWORK LAYER05
DIMENSION: IMX178_LV_REFB VER.A | IMX178_LV_REFB VER.A DRILL CHART | 1--Gerber TOP | 2--GROUND PLANE02 | 3--Gerber LAYER03 | 4--Gerber LAYER04 | 5--POWER PLANE05 | 6--Gerber BOTTOM
DISPLAY_BOTTOM: IMX178_LV_REFB VER.A PASTEMASK BOTTOM
DISPLAY_TOP: IMX178_LV_REFB VER.A PASTEMASK TOP
User.11: FIGURE | SIZE | 10.0 | 20.0 | 79.0 | 83.0 | 32.0 | DRILL CHART: TOP to BOTTOM | ALL UNITS ARE IN MILS | PLATED | NON-PLATED | QTY | 282 | 10 | 12 | 2 | 72
